# Altium PCB PCB1.PcbDoc
Units mm, origin at the board's own origin, x right, y up, seen from the top; angles counter-clockwise.
Board outline 110 x 40 mm, 2 copper layers (Top Layer, Bottom Layer); 97 components, 95 nets, 269 pads, 52 vias.
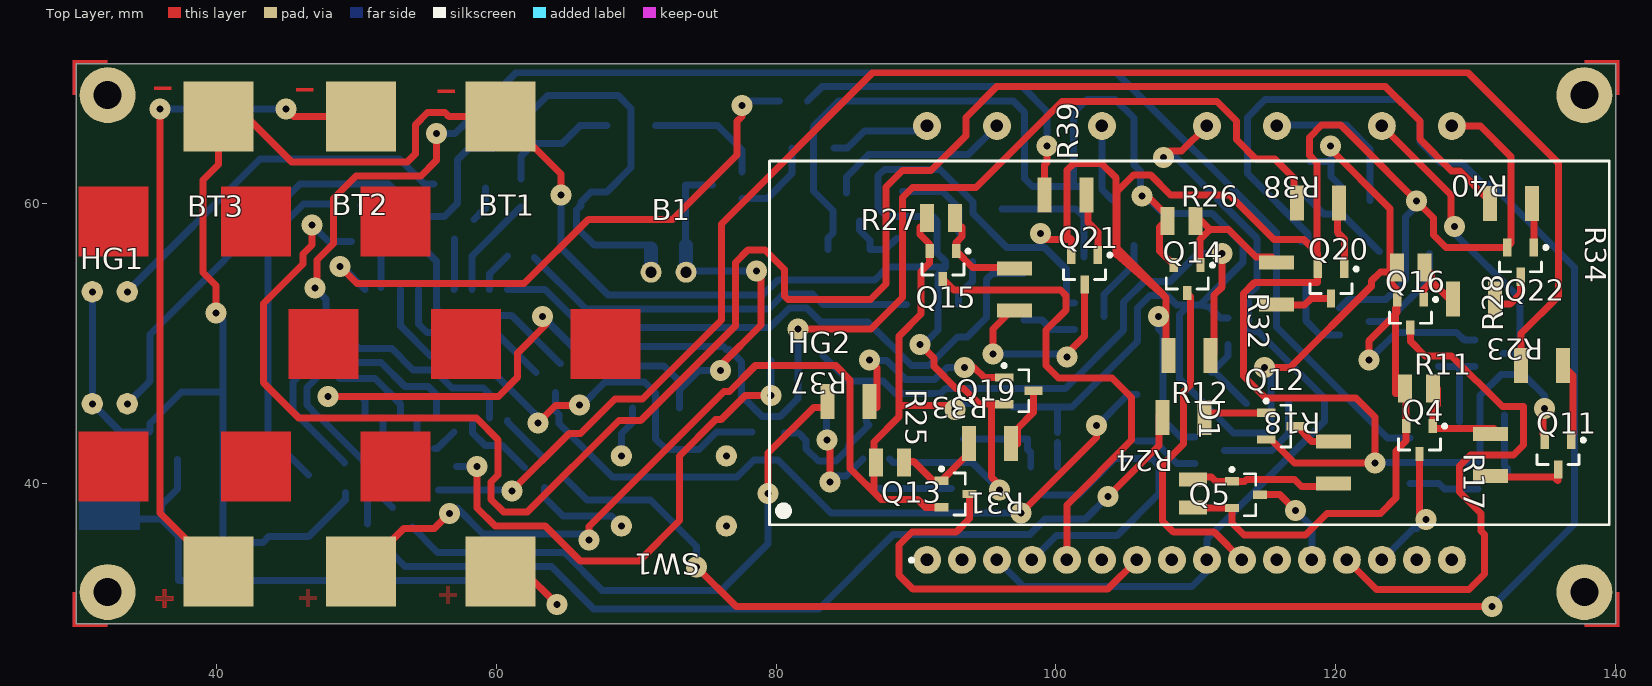
[diagram p0: Top Layer view]
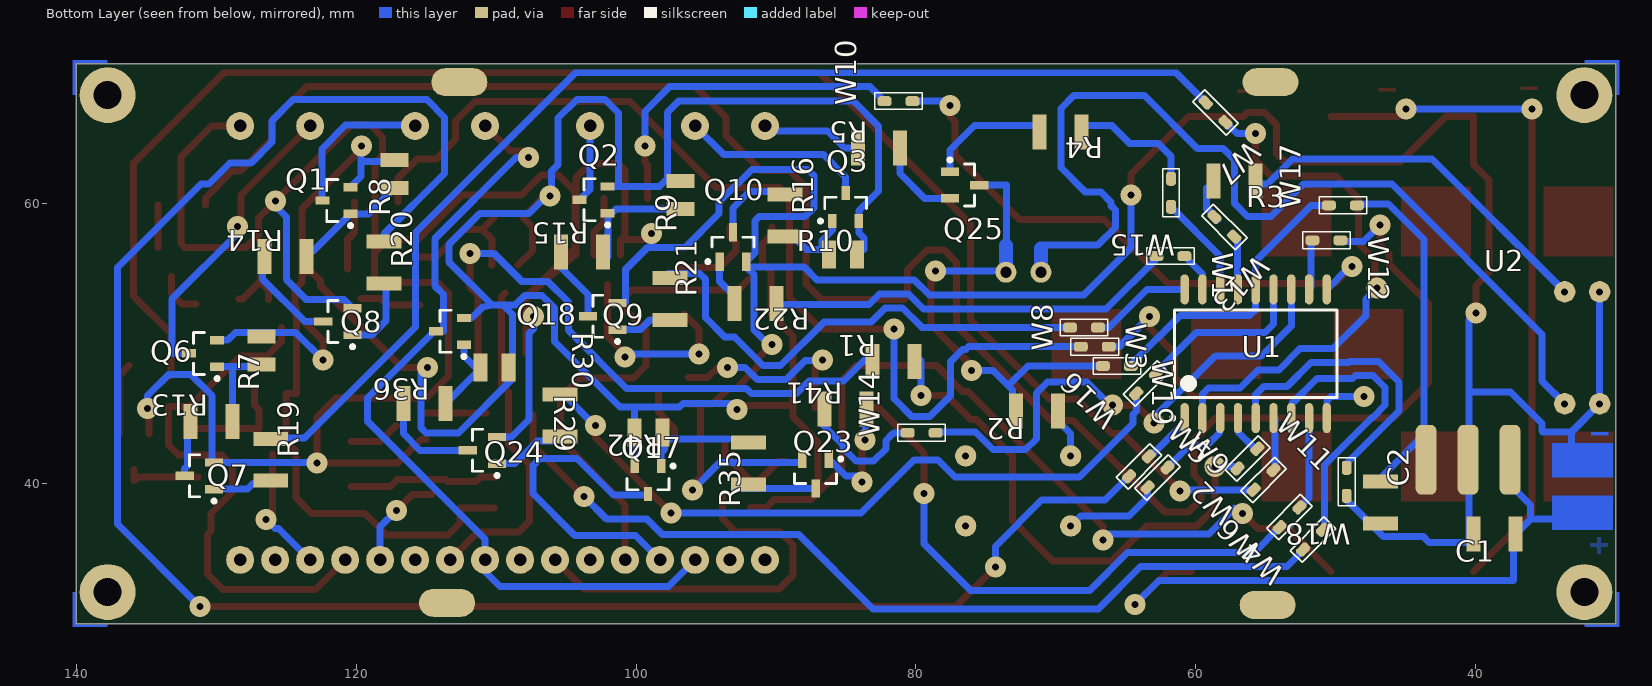
[diagram p1: Bottom Layer view, seen from below]

## Layer stack, top to bottom
Top Solder: solder mask 0.0102, Solder Resist, Dk 3.5
Top Layer: signal copper 0.0356
Dielectric 1: dielectric 0.32, FR-4, Dk 4.8
Bottom Layer: signal copper 0.0356
Bottom Solder: solder mask 0.0102, Solder Resist, Dk 3.5

## Board outline
30,30 30,70 140,70 140,30

## Design rules (kind name [scope] priority, off if disabled: settings)
Clearance [All] p1: gap=0.5 ignorepadtopadclearanceinfootprint=FALSE except(0: Arc-Hole Track-Hole SMDPad-Hole THPad-Hole Via-Hole Fill-Hole Poly-Hole Region-Hole Text-Hole)
HoleSize [All] p1: absolutevalues=TRUE maxlimit=1 minlimit=0.05 maxpercent=80.000 minpercent=20.000
HoleToHoleClearance [All] p1: gap=1 allowstackedmicrovias=TRUE
MinimumSolderMaskSliver [All] p1: minsoldermaskwidth=1
PolygonConnect [All] p1: connectstyle=Relief reliefconductorwidth=0.254 reliefentries=4 polygonreliefangle="90 Angle" airgapwidth=0.254
RoomDefinition Sheet1 [InComponentClass('Sheet1')] p1: confinementstyle=ConfineIn formatcopy=TRUE lockcomponents=FALSE outline 0,0 50.8,0 50.8,25.4 0,25.4
RoutingVias [All] p1: holewidth=0.5 width=1 viastyle="Through Hole" minholewidth=0.5 minwidth=1 maxholewidth=0.5 maxwidth=1.27
SolderMaskExpansion [All] p1: expansion=0.102
Width [All] p1: maxlimit=1 minlimit=0.5 preferedwidth=0.5
27 further rules are at their usual default settings.

## Components (designator, comment, footprint, x,y, rotation, side; value= is the part's Value field where it differs from the comment)
B1 "Motor" MOTOR 71.075,55.1 r0 top
BT1 "Battery 12V" BATTERYA23 50.3,56.229 r90 top
BT2 "Battery 12V" BATTERYA23 40.35,56.229 r90 top
BT3 "Battery 12V" BATTERYA23 30.175,56.229 r90 top
C1 "12V" F1206#1 40.675,35.15 r180 bottom value=330nF
C2 "6V" F1206#2 45.55,40.65 r90 bottom value=100nF
D1 "LED3" F1206#2 111.55,47.9 r0 top
HG1 "TLP621" Photocoupler 33.65,53.2 r270 top
HG2 "IVL2-7/5" -IVL2-7/5 109.535,50.05 r90 top locked
Q1 "BC856" SOT23_L 121.4,60.225 r0 bottom
Q2 "BC856" SOT23_L 103.025,60.275 r0 bottom
Q3 "BC856" SOT23_L 85.025,59.75 r90 bottom
Q4 "BC856" SOT23_L 125.975,43.1 r270 top
Q5 "BC856" SOT23_L 113.575,39.2 r0 top
Q6 "BC856" SOT23_L 130.925,49.3 r0 bottom
Q7 "BC847" SOT23_N 131.2,40.55 r0 bottom
Q8 "BC847" SOT23_N 121.3,51.575 r0 bottom
Q9 "BC847" SOT23_N 102.375,51.95 r0 bottom
Q10 "BC847" SOT23_N 93.075,56.9 r90 bottom
Q11 "BC847" SOT23_N 135.875,42.05 r270 top
Q12 "BC847" SOT23_N 116.075,44.1 r0 top
Q13 "BC856" SOT23_L 92.825,39.25 r0 top
Q14 "BC856" SOT23_L 109.375,54.6 r270 top
Q15 "BC856" SOT23_L 91.925,55.6 r270 top
Q16 "BC856" SOT23_L 125.325,52.15 r270 top
Q17 "BC856" SOT23_L 99.15,40.25 r270 bottom
Q18 "BC856" SOT23_L 113.3,50.875 r0 bottom
Q19 "BC847" SOT23_N 97.35,46.625 r0 top
Q20 "BC847" SOT23_N 119.65,54.275 r270 top
Q21 "BC847" SOT23_N 102.05,55.275 r270 top
Q22 "BC847" SOT23_N 133.2,55.825 r270 top
Q23 "BC847" SOT23_N 87.175,40.7 r270 bottom
Q24 "BC847" SOT23_N 110.975,42.375 r0 bottom
Q25 "BC847" SOT23_N 76.525,61.325 r180 bottom
R1 "Res2" F1206#2 83.6,49.975 r0 bottom value=100Ohm
R2 "Res2" F1206#1 73.35,43.925 r180 bottom value=10K
R3 "Res2" F1206#2 55.25,60.35 r180 bottom value=120Ohm?
R4 "Res2" F1206#2 67.675,63.875 r180 bottom value=3,3k
R5 "Res2" F1206#2 84.65,65.225 r0 bottom value="56-100 Ohm"
R7 "Res2" F0805 127.775,48 r270 bottom value=10K
R8 "Res2" F0805 118.275,60.625 r270 bottom value=10K
R9 "Res2" F0805 97.825,59.125 r270 bottom value=10K
R10 "Res2" F0805 86.725,57.353 r0 bottom value=10K
R11 "Res2" F0805 127.45,45.8 r0 top value=10K
R12 "Res2" F0805 110.795,40.8 r90 top value=10K
R13 "Res2" F1206#2 132.325,45.675 r0 bottom value=330K
R14 "Res2" F1206#2 127.05,57.475 r0 bottom value=330K
R15 "Res2" F1206#2 105.875,57.8 r0 bottom value=330K
R16 "Res2" F1206#2 88.1,61.15 r90 bottom value=330K
R17 "Res2" F1206#2 129.8,40.025 r270 top value=330K
R18 "Res2" F1206#2 121.075,43.5 r90 top value=330K
R19 "Res2" F1206#2 124.85,43.7 r90 bottom value=10K
R20 "Res2" F1206#2 116.775,57.8 r90 bottom value=10K
R21 "Res2" F1206#2 96.325,55.2 r90 bottom value=10K
R22 "Res2" F1206#2 89.45,51.625 r180 bottom value=10K
R23 "Res2" F1206#2 132.725,49.675 r180 top value=10K
R24 "Res2" F1206#2 107.1,45.975 r180 top value=10K
R25 "Res2" F0805 89.65,40.5 r0 top value=10K
R26 "Res2" F0805 110.475,57.75 r0 top value=10K
R27 "Res2" F0805 93.3,57.988 r0 top value=10K
R28 "Res2" F0805 126.85,54.423 r0 top value=10K
R29 "Res2" F0805 97.6,42.65 r180 bottom value=10K
R30 "Res2" F0805 111.6,49.3 r0 bottom value=10K
R31 "Res2" F1206#2 97.275,41.6 r0 top value=330K
R32 "Res2" F1206#2 114.5,52.3 r270 top value=330K
R33 "Res2" F1206#2 95.8,51.875 r270 top value=330K
R34 "Res2" F1206#2 131.875,51.95 r0 top value=330K
R35 "Res2" F1206#2 93.225,39.425 r270 bottom value=330K
R36 "Res2" F1206#2 117.1,46.975 r0 bottom value=330K
R37 "Res2" F1206#2 83.175,47.125 r180 top value=10K
R38 "Res2" F1206#2 116.725,61.3 r180 top value=10K
R39 "Res2" F1206#2 98.7,61.875 r180 top value=10K
R40 "Res2" F1206#2 130.5,61.275 r180 top value=10K
R41 "Res2" F1206#2 87.05,46.575 r0 bottom value=10K
R42 "Res2" F1206#2 104.2,46.875 r90 bottom value=10K
SW1 "Key" Button 68.95,41.975 r0 top
U1 "PIC16F628-04I/SO" MCHP-SOIC-SO18_N 55.725,49.275 r90 bottom
U2 "L7805ABV" KREN 35.55,48.7 r180 bottom
W1 "Jumper" перемычка 62.825,56.25 r180 bottom
W2 "Jumper" перемычка 54.455,40.973 r315 bottom
W3 "Jumper" перемычка 69,51.15 r180 bottom
W4 "Jumper" перемычка 50.925,36.7 r315 bottom
W5 "Jumper" перемычка 64.775,40.525 r135 bottom
W6 "Jumper" перемычка 52.6,38.3 r315 bottom
W7 "Jumper" перемычка 59.3,67.225 r225 bottom
W8 "Jumper" перемычка 66.225,49.775 r0 bottom
W9 "Jumper" перемычка 63.449,39.726 r135 bottom
W10 "Jumper" перемычка 80.25,67.325 r0 bottom
W11 "Jumper" перемычка 57.025,41.075 r135 bottom
W12 "Jumper" перемычка 51.675,57.375 r180 bottom
W13 "Jumper" перемычка 58.675,59.05 r225 bottom
W14 "Jumper" перемычка 78.6,43.625 r0 bottom
W15 "Jumper" перемычка 61.775,61.775 r270 bottom
W16 "Jumper" перемычка 62.85,47.85 r315 bottom
W17 "Jumper" перемычка 48.5,59.875 r0 bottom
W18 "Jumper" перемычка 49.225,41.125 r270 bottom
W19 "Jumper" перемычка 66.65,48.4 r180 bottom

## Footprints (in the part's own frame and the unit in brackets; to place one, negate y for a bottom-side part, rotate by r counter-clockwise, add the part's x,y. Pads: shape width x height; smd on the part's side, far side on the other; paste and mask are expansions set on the pad)
-IVL2-7/5 [mm] "SOP, 32-Leads, Body 59,00x25,50mm, Pitch 2,50mm, IPC Medium Density"
  round 2 hole 0.9: 1(15.5,18.75) 2(15.5,13.75) 3(-15.5,13.75) 4(-15.5,11.25) 5(-15.5,8.75) 6(15.5,6.25) 7(-15.5,3.75) 8(15.5,-1.25) 9(-15.5,-1.25) 10(-15.5,-3.75) 11(15.5,-6.25) 12(-15.5,-8.75) 13(-15.5,-11.25) 14(-15.5,-13.75) 15(15.5,-13.75) 16(15.5,-18.75) 17(-15.5,-18.75) 18(-15.5,-16.25) 19(-15.5,-6.25) 20(-15.5,1.25) 21(-15.5,6.25) 22(-15.5,16.25) 23(-15.5,18.75)
  silkscreen extent -15.65,-30 13,30, body extent -13,-30 13,38, height 10
BATTERYA23 [mm]
  rect 5x5 smd: 1(-22.5,-10) 2(10,-10)
  Top Layer region: -8.75,-20 -3.75,-20 -3.75,-15 -8.75,-15
  Top Layer region: -17.5,-5 -12.5,-5 -12.5,0 -17.5,0
  Top Layer region: 0,-5 5,-5 5,0 0,0
Button [mm]
  round 1.524 hole 0.5: 1(0,0) 2(0,-5) 3(7.5,-5) 4(7.5,0)
F0805 [mm]
  rect 1x2 smd: 1(-0.5,1) 2(-2.5,1)
F1206#1 [mm]
  rect 1x2.5 smd: 1(0.5,1.25) 2(3.5,1.25)
F1206#2 [mm]
  rect 1x2.5 smd: 1(-0.5,1.25) 2(-3.5,1.25)
KREN [mm]
  rrect60% 1.5x5 smd: 1(-2,-7) 2(-5,-7) 3(-8,-7)
MCHP-SOIC-SO18_N [mm] "SOIC, 18-Leads, Body 11.55x7.5mm, Pitch 1.27mm, IPC Medium Density"
  oval 2.15x0.6 smd: 1(-4.6,5.08) 2(-4.6,3.81) 3(-4.6,2.54) 4(-4.6,1.27) 5(-4.6,0) 6(-4.6,-1.27) 7(-4.6,-2.54) 8(-4.6,-3.81) 9(-4.6,-5.08) 10(4.6,-5.08) 11(4.6,-3.81) 12(4.6,-2.54) 13(4.6,-1.27) 14(4.6,0) 15(4.6,1.27) 16(4.6,2.54) 17(4.6,3.81) 18(4.6,5.08)
  silkscreen extent -4.72,-5.8 3.12,6.06, body extent -3.75,-5.8 3.75,5.8, height 2.65
MOTOR [mm]
  round 1.5 hole 0.8: 1(0,0) 2(2.5,0)
Photocoupler [mm]
  round 1.524 hole 0.5: 1(-0.5,0) 2(-0.5,-2.5) 3(7.5,-2.5) 4(7.5,0)
SOT23_L [mm] "SOT23, 3-Leads, Body 2.9x1.3mm, Pitch 0.95mm, Lead Span 2.3mm, IPC High Density"
  rect 1x0.6 smd: 1(-1,0.95) 2(-1,-0.95) 3(1,0)
  silkscreen extent -1.12,-1.5 0.7,1.92, body extent -0.7,-1.5 0.7,1.5, height 1.1
SOT23_N [mm] "SOT23, 3-Leads, Body 2.9x1.3mm, Pitch 0.95mm, Lead Span 2.3mm, IPC Medium Density"
  rect 1.3x0.6 smd: 1(-1.05,0.95) 2(-1.05,-0.95) 3(1.05,0)
  silkscreen extent -1.17,-1.5 0.7,1.92, body extent -0.7,-1.5 0.7,1.5, height 1.1
перемычка [mm]
  rrect60% 1x0.7 smd: 1(0,0) 2(2,0)
  silkscreen extent -0.7,-0.6 2.7,0.6

## Part data
B1: "Motor, General Kind", LatestRevisionDate=17-Jul-2002, LatestRevisionNote="Re-released for DXP Platform.", PackageDescription="Capacitor (Radial); 2 Leads", PackageReference=RB5-10.5, Published=24-Mar-1999, Publisher="Altium Limited"
BT1 BT2 BT3: library part Battery, "Multicell Battery", LatestRevisionDate=17-Jul-2002, LatestRevisionNote="Re-released for DXP Platform.", PackageDescription="Battery; 2 Leads", PackageReference=BAT-2, Published=24-Mar-1999, Publisher="Altium Limited"
C1 C2: library part Cap, "Capacitor", LatestRevisionDate=17-Jul-2002, LatestRevisionNote="Re-released for DXP Platform.", PackageDescription="Radial Cap, Thru-Hole; 2 Leads; 0.3 in Pin Spacing", PackageReference=RAD-0.3, Published=8-Jun-2000, Publisher="Altium Limited"
D1: "Typical BLUE SiC LED", DatasheetVersion=16-Apr-2002, LatestRevisionDate=17-Dec-2003, LatestRevisionNote="PCB Footprint replaced.", PackageDescription="SM LED; 2 C-Bend Leads; Body 3.5 x 2.8 x 1.9 mm, inc leads (LxWxH typ)", PackageReference=3.5X2.8X1.9, PackageVersion=16-Apr-2002, Published=8-Jun-2000, Publisher="Altium Limited"
HG1: library part Photocoupler
Q1 Q2 Q3 Q4 Q5 Q6 Q13 Q14 Q15 Q16 Q17 Q18: "PNP General-purpose Transistor", ComponentLink1Description="Manufacturer Link", ComponentLink1URL=http://www.semiconductors.philips.com/, ComponentLink2Description=Datasheet, ComponentLink2URL=http://www.semiconductors.philips.com/acrobat/datasheets/BC856_BC857_BC858_6.pdf, DatasheetVersion=4-Feb-2002, LatestRevisionDate=12-Dec-2006, LatestRevisionNote="IPC-7351 Footprint Added.", PackageDescription="3-Pin SOT-23 Package 0.95 mm Pitch, 2.3 mm Lead Span", PackageReference=SOT23, PackageVersion=May-1999, Published=17-Sep-2003, Publisher="Altium Limited"
Q7 Q8 Q9 Q10 Q11 Q12 Q19 Q20 Q21 Q22 Q23 Q24 Q25: "NPN General-purpose Transistor", ComponentLink1Description="Manufacturer Link", ComponentLink1URL=http://www.semiconductors.philips.com/, ComponentLink2Description=Datasheet, ComponentLink2URL=http://www.semiconductors.philips.com/acrobat/datasheets/BC846_BC847_BC848_5.pdf, DatasheetVersion=4-Feb-2002, LatestRevisionDate=12-Dec-2006, LatestRevisionNote="IPC-7351 Footprint Added.", PackageDescription="3-Pin SOT-23 Package 0.95 mm Pitch, 2.3 mm Lead Span", PackageReference=SOT23, PackageVersion=May-1999, Published=17-Sep-2003, Publisher="Altium Limited"
R1 R2 R3 R4 R5 R7 R8 R9 R10 R11 R12 R13 R14 R15 R16 R17 R18 R19 R20 R21 R22 R23 R24 R25 R26 R27 R28 R29 R30 R31 R32 R33 R34 R35 R36 R37 R38 R39 R40 R41 R42: "Resistor", LatestRevisionDate=17-Jul-2002, LatestRevisionNote="Re-released for DXP Platform.", PackageDescription="Axial Device, Thru-Hole; 2 Leads; 0.4 in Pin Spacing", PackageReference=AXIAL-0.4, Published=8-Jun-2000, Publisher="Altium Limited"
SW1: library part SW
U1: "Flash-Based 8-Bit CMOS Microcontroller, 4 MHz, 16 I/O, -40 to 85 degC, 18-pin SOIC (SO18), Tube", Manufacturer=Microchip, Operation Voltage Range="3V - 5.5V", Supplier Part Number 1=PIC16F628-04I/SO-ND, ComponentLink1Description=Datasheet, ComponentLink1URL=http://ww1.microchip.com/downloads/en/DeviceDoc/40300C.pdf, ComponentLink2Description="Package Specification", ComponentLink2URL=http://www.microchip.com/stellent/groups/techpub_sg/documents/packagingspec/en012702.pdf, ComponentLink3Description="URL Link1", ComponentLink3URL="Product URL:http://www.microchip.com/datasheet/PIC16F628", DatasheetVersion="Rev. C", Digital Communication="0 -UART, 1 -A/E/USART, 0 -SPI, 0 -I2C", EEPROM Data Memory (bytes)=128, I/O Pins=16, Max. CPU Speed MHz=4, Memory Type=Flash, Mounting Technology="Surface Mount", PackageDescription="18-Lead Plastic Small Outline, 7.5 x 11.55 mm Body, 1.27 mm Pitch", PackageReference=SOIC-SO18, PackageVersion="C04-051C, 12/2012", Packing=TUBE, PartNumber=PIC16F628-04I/SO, Program Memory KBytes=3.5, Program Memory KWords=2, RAM=224, RoHS=TRUE, Supplier 1=Digi-Key, Supplier 2=Newark, Supplier 3=Mouser, Supplier Part Number 2=65K1041, Supplier Part Number 3=579-PIC16F628-04I/SO, Timers="2 - 8-bit, 1 - 16-bit"
U2: "Positive Voltage Regulator, 5V, 3-Pin TO-220", ComponentLink1Description="Manufacturer URL", ComponentLink1URL=http://www.st.com, ComponentLink2Description=Datasheet, ComponentLink2URL=http://www.st.com/internet/com/TECHNICAL_RESOURCES/TECHNICAL_LITERATURE/DATASHEET/CD00000444.pdf, ComponentLink3Description="Package Specification", ComponentLink3URL=http://www.st.com/internet/com/TECHNICAL_RESOURCES/TECHNICAL_LITERATURE/PACKAGE_INFORMATION/CD00004649.pdf, DatasheetVersion=Nov-2011, PackageDescription="TO, Thru-Hole, Vertical, Heatsink Mounted; 3 In-Line Leads; Pitch 2.54 mm", PackageReference=TO220, PackageVersion=ver3.0, PartNumber=L7805ABV
W1 W2 W3 W4 W5 W6 W7 W8 W9 W10 W11 W12 W13 W14 W15 W16 W17 W18 W19: "Jumper Wire", LatestRevisionDate=17-Jul-2002, LatestRevisionNote="Re-released for DXP Platform.", PackageDescription="Radial Cap, Thru-Hole; 2 Leads; 0.2 in Pin Spacing", PackageReference=RAD-0.2, Published=24-Mar-1999, Publisher="Altium Limited"

## Free pads (board coordinates)
  round 4 hole 2: 1(32.25,67.75) 2(137.75,67.75) 3(137.75,32.25) 4(32.25,32.25)
  oval 4x2 smd far side mask+0.102: 6(54.875,31.325)
  oval 4x2 smd far side: 7(54.675,68.675) 8(112.625,68.675) 9(113.5,31.475)

## Via types
v1: diameter 1.5, hole 0.5, Top Layer to Bottom Layer, 52 vias

## Nets (pads, with @x,y where several pads share a name; then routed paths per layer and width w, separated by ;. In a path a pad name is that pad's centre, name@x,y a point inside that pad or via, vN(x,y) a via of type N, cw(c..) or ccw(c..) an arc to the next point about the centre after c; other vN are vias at no path point)
5V: C2.1 U2.3 W17.1 | length 25.4
  Bottom Layer w0.5: U2.3@43.7,41.85 43.7,57.446 46.229,59.975 48.4,59.975 W17.1 ; U2.3@43.8,43.4 C2.1@46.6,40.6
GND: BT1.2 BT3.2 C1.1 C2.2 D1.2 HG1.2 HG1.3 HG2.16 Q7.2 Q8.2 Q9.2 Q10.2 Q11.2 Q12.2 Q19.2 Q20.2 Q21.2 Q22.2 Q23.2 Q24.2 U2.2 W18.2 | length 362
  Top Layer w0.5: v1(39.975,52.2) 39.975,54.15 39.05,55.075 39.05,61.675 40.175,62.8 BT3.2 42.15,66.229 45.4,62.979 53.654,62.979 54.225,63.55 54.225,65.621 55.104,66.5 56.346,66.5 56.618,66.229 BT1.2 60.521,66.229 64.625,62.125 v1(64.625,60.625) ; v1(90.304,49.927) 91.304,48.927 91.304,48.356 92.858,46.802 93.401,46.802 94.528,45.675 Q19.2 ; 95.4,45.675 95.4,40.45 95.975,39.875 v1(95.975,39.55) ; v1(98.9,57.875) 99.34,57.435 101.1,57.435 ; Q21.2 101.1,57.435 ; D1.2@107.875,49.325 107.875,53.264 ; Q12.2 115.367,43.15 117.042,41.475 v1(122.8,41.475) 122.8,44.75 121.45,46.1 114.979,46.1 113.4,47.679 113.4,53.575 114.206,54.381 118.7,54.381 Q20.2 118.7,56.458 ; HG2.16 130.325,65.55 132.525,63.35 132.525,57.171 Q22.2@132.25,56.896 ; Q22.2 Q22.2@132.25,56.896 ; Q11.2@134.798,43.55 134.798,45.273 v1(134.9,45.375) ; 101.1,57.435 100.8,57.735 100.8,62.4 101.275,62.875 103.266,62.875 104.307,61.834 104.307,56.382 107.875,53.264 ; 107.875,53.264 107.425,53.763 104.35,56.838 104.35,60.871 105.529,62.05 106.771,62.05 108.196,60.625 112.4,60.625 115.575,57.45 117.708,57.45 118.7,56.458 ; 118.7,56.458 118.65,56.508 118.65,62.911 118.106,63.455 118.106,64.724 118.985,65.603 120.347,65.603 126.969,58.981 126.969,57.767 127.861,56.875 128.539,56.875 132.229,56.875 Q22.2@132.25,56.896
  Bottom Layer w0.5: HG1.2 HG1.3 33.15,43.7 ; 33.15,40.925 33.15,43.7 ; v1(39.975,52.2) 40.5,51.675 40.5,46.55 ; W18.2@49.225,39.375 49.225,38.825 46.6,36.2 43.732,36.2 43.332,35.8 40.5,35.8 40.5,46.55 ; v1(64.625,60.625) 64.625,56.85 68.01,53.465 79.04,53.465 80.125,54.55 87.062,54.55 87.986,55.474 Q10.2@92.125,55.474 ; Q23.2 88.371,41.504 94.021,41.504 v1(95.975,39.55) ; v1(90.304,49.927) 90.527,49.927 91.575,50.975 91.575,54.924 Q10.2@92.125,55.474 ; v1(98.9,57.875) 98.9,56.875 98.925,56.85 ; Q9.2 100.736,52.9 100.736,55.314 99.2,56.85 98.925,56.85 ; v1(107.33,51.928) 107.33,51.047 107.645,50.732 107.645,44.577 108.897,43.325 Q24.2 ; Q8.2 120.875,53.15 123.564,53.15 124.975,54.561 124.975,59.05 v1@126.2,60.275 ; v1(122.8,41.475) 122.825,41.5 Q7.2 130.3,41.65 130.3,46.286 131.789,47.775 133.411,47.775 134.9,46.286 v1(134.9,45.375) ; 33.15,43.7 35.225,43.7 35.275,43.75 35.275,44.3 37.525,46.55 40.5,46.55 ; Q10.2@92.125,55.474 Q10.2 91.5,56.475 91.5,58.775 91.2,59.075 87.925,59.075 87.3,59.7 87.3,62.011 87.739,62.45 91.729,62.45 94.075,60.104 94.075,59.289 96.514,56.85 98.925,56.85
  other v1: 125.775,60.2
I_SEGMENT_A: HG2.14 Q4.3 | length 9.2
  Top Layer w0.5: Q4.3 125.975,37.875 v1(126.425,37.425)
  Bottom Layer w0.5: HG2.14 125.535,36.8 125.8,36.8 v1(126.425,37.425)
I_SEGMENT_B: HG2.12 Q5.3 | length 7
  Top Layer w0.5: Q5.3 116,39.2 v1(117.125,38.075)
  Bottom Layer w0.5: v1(117.125,38.075) 118.285,36.915 HG2.12
I_SEGMENT_C: HG2.7 Q13.3 | length 28
  Top Layer w0.5: Q13.3 93.828,39.25 93.828,37.503 92.875,36.55 89.725,36.55 88.775,35.6 88.775,33.45 89.775,32.45 103.685,32.45 HG2.7
I_SEGMENT_D: HG2.10 Q14.3 | length 24
  Top Layer w0.5: Q14.3 109.6,53.375 109.6,47.05 109.1,46.55 109.1,42.831 107.6,41.331 107.6,37.307 108.382,36.525 111.31,36.525 HG2.10
I_SEGMENT_E: HG2.5 Q15.3 | length 35.4
  Top Layer w0.5: Q15.3 92.7,53.825 100.318,53.825 100.725,53.418 100.725,52.382 99.3,50.957 99.3,48.429 100.179,47.55 104,47.55 105.41,46.14 105.41,43.104 100.785,38.479 HG2.5
I_SEGMENT_F: HG2.13 Q16.3 | length 38.6
  Top Layer w0.5: HG2.13 122.91,32.425 129.525,32.425 130.625,33.525 130.625,36.362 130.375,36.612 130.375,37.854 128.825,39.404 128.825,41.25 129.625,42.05 132.7,42.05 133.4,42.75 133.4,45.491 131.902,45.491 128.27,49.124 126.365,49.124 125.325,50.164 Q16.3
I_SEGMENT_G: HG2.4 Q17.3 | length 22.5
  Bottom Layer w0.5: HG2.4 100.035,36.3 104.378,36.3 107.374,39.296 107.374,41.272 106.871,41.775 104.216,41.775 101.616,39.175 Q17.3@99.15,39.175
I_SETKA1: HG2.15 Q6.3 | length 21.6
  Top Layer w0.5: HG2.15 128.219,60.616 128.219,58.638 v1(128.482,58.375)
  Bottom Layer w0.5: v1(128.482,58.375) 128.482,57.878 133.172,53.188 133.172,49.3 Q6.3
I_SETKA2: HG2.11 Q1.3 | length 11.1
  Bottom Layer w0.5: HG2.11 115.838,65.603 120.757,65.603 122.45,63.91 Q1.3@122.45,60.225
I_SETKA4: HG2.6 Q2.3 | length 5.6
  Bottom Layer w0.5: HG2.6 103.285,61.015 Q2.3
I_SETKA5: HG2.2 Q3.3 | length 13.4
  Bottom Layer w0.5: Q3.3 85.025,61.911 86.614,63.5 93.735,63.5 HG2.2
I_TOCHKI: HG2.3 HG2.8 HG2.9 Q18.3 | length 59.5
  Top Layer w0.5: v1(107.68,63.303) 108.127,63.75 108.985,63.75 HG2.8
  Bottom Layer w0.5: HG2.3 97.685,32.65 109.725,32.65 110.785,33.71 110.785,36.033 119.2,44.448 119.2,46.121 114.446,50.875 Q18.3 113.767,50.875 113.767,53.518 114.38,54.132 114.38,57.488 108.566,63.303 v1(107.68,63.303)
NetB1_1: B1.1 HG1.4 | length 69.6
  Bottom Layer w0.5: HG1.4 35.261,47.311 35.261,50.661 46,61.4 52.314,61.4 54.639,59.075 56.3,59.075 57.225,60 57.225,63.125 58.048,63.948 59.901,63.948 63.678,67.725 68.725,67.725 69.65,66.8 69.65,62.568 67.907,60.825 66.782,60.825 66.05,60.093 66.05,59.846 65.75,59.546 65.75,58.304 67.025,57.029 70.846,57.029 71.075,56.8
  Bottom Layer w1: B1.1 71.075,56.8
NetB1_2: B1.2 Q25.3 R2.1 W19.1 | length 34.9
  Top Layer w0.5: v1(76.05,48.075) 76.05,48.45 78.925,51.325 v1@78.925,54.85
  Bottom Layer w0.5: W19.1 72,48.4 73.412,46.988 ; R2.1@73.1,45.4 73.1,46.675 74.5,48.075 v1(76.05,48.075) ; B1.2@73.55,55.3 73.55,61.325 Q25.3 ; B1.2@73.663,55.187 73.672,55.178 v1(78.604,55.178)
  Bottom Layer w1: B1.2 73.575,57.025
NetBT1_1: BT1.1 C1.2 U2.1 | length 44.9
  Top Layer w0.5: BT1.1 61.996,33.729 v1(64.35,31.375)
  Bottom Layer w0.5: 33.6,37.45 36.1,37.45 ; U2.1@37.25,41.725 37.25,39.606 36.1,38.456 36.1,37.45 ; v1(64.35,31.375) 62.65,33.075 37.315,33.075 37.315,36.235 36.1,37.45
NetBT2_1: BT2.1 Q1.2 Q2.2 Q3.2 Q4.2 Q5.2 Q6.2 Q13.2 Q14.2 Q15.2 Q16.2 Q17.2 Q18.2 R7.2 R8.2 R9.2 R10.2 R11.2 R12.2 R25.2 R26.2 R27.2 R28.2 R29.2 R30.2 | length 277.2
  Top Layer w0.5: BT2.1 53.426,36.805 55.605,36.805 v1(56.675,37.875) ; v1(66.65,35.95) 66.65,36.939 76.286,46.575 76.671,46.575 78.514,48.418 84.272,48.418 85.3,47.39 85.3,41.083 87.508,38.875 90.099,38.875 90.674,38.3 Q13.2 ; 87,39.5 87,42.975 88.804,44.779 88.804,50.549 90.354,52.099 90.354,55.15 90.975,55.771 Q15.2 90.975,57.125 90.3,57.8 R27.2@90.3,58.325 ; 88.875,45.575 90.825,45.575 92.507,45.575 v1(92.78,45.302) ; v1(106.15,60.55) 106.529,60.55 108.075,59.004 107.4,58.329 107.4,56.625 Q14.2 ; R12.2@110.125,38.25 Q5.2@112.573,38.25 ; Q5.2 Q5.2@112.573,38.25 ; v1(114.9,48.3) 116.736,48.3 122.53,54.094 122.53,54.465 123.19,55.125 R28.2@123.85,55.125 ; v1(119.606,64.103) 119.606,63.9 123.85,59.656 R28.2@123.85,55.125 ; v1(122.35,48.825) 122.35,50.197 124.275,52.122 ; Q5.2@112.573,38.25 112.573,37.186 113.442,36.317 117.825,36.317 119.38,37.871 123.19,37.871 124.3,38.981 124.3,42.328 125.025,43.053 Q4.2 125.025,46.445 124.275,46.445 124.275,52.122 ; R28.2@123.85,55.125 123.85,54.398 124.375,53.873 Q16.2 124.375,52.638 ; 124.275,52.122 124.375,52.222 124.375,52.638 ; 124.275,52.122 124.275,52.538 124.375,52.638
  Bottom Layer w0.5: v1(56.675,37.875) 56.85,37.875 57.225,38.25 59.077,36.398 66.202,36.398 v1(66.65,35.95) ; R10.2@83.725,56.725 83.725,57.556 84.075,57.906 Q3.2 84.075,59.512 82.675,60.912 82.675,65.525 84.475,67.325 96.95,67.325 97.75,66.525 97.75,61.791 98.316,61.225 Q2.2 ; v1(92.78,45.302) 93.197,45.72 96.655,45.72 96.9,45.475 101.152,45.475 105.825,50.148 105.825,52.544 106.709,53.428 107.952,53.428 108.629,52.75 109.494,52.75 ; R29.2 100.1,45.45 ; Q17.2@100.125,41.175 R29.2@100.125,42.95 ; 101.25,61.225 101.25,66.475 102.225,67.45 104.229,67.45 105.575,66.104 105.575,62.775 106.025,62.325 106.025,60.9 107.635,59.29 111.165,59.29 113.38,57.074 113.38,55.831 110.299,52.75 110.275,52.75 ; Q18.2 111.745,51.825 110.973,52.598 110.275,52.75 ; v1(114.9,48.3) 115.35,47.85 115.35,43.975 115,43.625 112.687,43.625 108.825,47.487 108.825,51.301 108.83,51.306 108.83,52.087 109.494,52.75 ; R8.2@118.15,63 119.65,63 119.65,62.475 ; v1(119.606,64.103) 119.65,64.059 119.65,62.475 ; Q1.2 119.65,61.925 119.65,62.475 ; v1(122.35,48.825) 124.325,50.8 128.626,50.8 129.176,50.25 Q6.2 ; 109.494,52.75 110.275,52.75
NetBT2_2: BT2.2 BT3.1 | length 49.3
  Top Layer w0.5: v1(36,66.75) 36,37.904 BT3.1 ; v1(45,66.75) 45.521,66.229 BT2.2
  Bottom Layer w0.5: v1@36,66.75 v1(45,66.75)
NetD1_1: D1.1 R1.1 | length 42.4
  Top Layer w0.5: D1.1@111.3,49.325 111.3,53.475 111.88,54.055 v1(111.88,56.453)
  Bottom Layer w0.5: R1.1@83.35,49.15 85.173,47.327 87.633,47.327 88.533,46.427 91.754,46.427 92.129,46.802 100.674,46.802 104.825,50.954 104.825,52.958 106.317,54.45 108.168,54.45 110.171,56.453 v1(111.88,56.453)
NetHG1_1: HG1.1 R3.1 | length 26.6
  Bottom Layer w0.5: HG1.1 43.125,63.175 53.1,63.175 54.875,61.4 R3.1@55.55,61.4
NetHG2_1: HG2.1 R5.1 | length 7.3
  Bottom Layer w0.5: R5.1 85.1,63.975 86.325,65.2 90.435,65.2 HG2.1
NetQ1_1: Q1.1 R8.1 R14.2 | length 7.7
  Bottom Layer w0.5: R8.1 119.125,59.275 Q1.1 R14.2@123.1,56.575
NetQ2_1: Q2.1 R9.1 R15.2 | length 8.9
  Bottom Layer w0.5: R9.1@96.15,59.625 101.425,59.625 102,59.05 R15.2@102,56.2
NetQ3_1: Q3.1 R10.1 R16.2 | length 5
  Bottom Layer w0.5: Q3.1 85.975,58.103 86.725,57.353 86.725,56.725 87.833,56.725 88.633,57.525 R16.2@89.05,57.525
NetQ4_1: Q4.1 R11.1 R17.2 | length 7.4
  Top Layer w0.5: R11.1@127.275,46.8 127.275,45.613 126.925,45.263 Q4.1 126.925,43.925 R17.2@131.3,43.925
NetQ5_1: Q5.1 R12.1 R18.2 | length 10.8
  Top Layer w0.5: R12.1@110,40.475 111.12,40.475 111.445,40.15 Q5.1 113.462,40.15 113.603,40.291 117.036,40.291 117.553,39.775 R18.2@120.375,39.775
NetQ6_1: Q6.1 R7.1 R13.2 | length 6.5
  Bottom Layer w0.5: R7.1@127.325,48.35 Q6.1 ; R13.2 128.825,48.275
NetQ7_1: Q7.1 R19.2 | length 5
  Bottom Layer w0.5: R19.2@125.3,40 127.361,40 127.761,39.6 Q7.1
NetQ7_3: Q7.3 R13.1 | length 4.4
  Bottom Layer w0.5: R13.1@132.05,44.9 132.05,41.264 132.25,41.064 Q7.3
NetQ8_1: Q8.1 R20.2 | length 5.5
  Bottom Layer w0.5: R20.2@117.85,54.3 117.85,51.65 118.875,50.625 Q8.1
NetQ8_3: Q8.3 R14.1 | length 7.4
  Bottom Layer w0.5: Q8.3 123.66,51.575 126.675,54.59 R14.1@126.675,56.45
NetQ9_1: Q9.1 R21.2 | length 3.9
  Bottom Layer w0.5: R21.2@97.7,51.7 98.989,51.7 99.689,51 Q9.1
NetQ9_3: Q9.3 R15.1 | length 6
  Bottom Layer w0.5: Q9.3 103.425,53.5 105.587,55.662 R15.1@105.587,57.012
NetQ10_1: Q10.1 R22.2 | length 3.5
  Bottom Layer w0.5: R22.2@93.05,52.8 93.05,53.478 94.025,54.453 Q10.1
NetQ10_3: Q10.3 R16.1 | length 6.3
  Bottom Layer w0.5: R16.1@89.05,60.875 91.89,60.875 93.075,59.69 Q10.3
NetQ11_1: Q11.1 R23.2 | length 5.2
  Top Layer w0.5: R23.2 136.925,47.725 Q11.1@136.925,43.55
NetQ11_3: Q11.3 R17.1 | length 5.5
  Top Layer w0.5: R17.1@131.3,40.475 135.6,40.475 135.875,40.2 Q11.3
NetQ12_1: Q12.1 R24.2 | length 4.3
  Top Layer w0.5: R24.2@110.725,45.05 Q12.1
NetQ12_3: Q12.3 R18.1 | length 3.7
  Top Layer w0.5: Q12.3 117.175,44.1 118.275,43 R18.1@120.375,43
NetQ13_1: Q13.1 R25.1 R31.2 | length 6.5
  Top Layer w0.5: R25.1@89.275,41.575 89.84,41.575 91.215,40.2 Q13.1 93.65,42.025 R31.2@93.65,42.825
NetQ14_1: Q14.1 R26.1 R32.2 | length 9.3
  Top Layer w0.5: R26.1@110.15,59.025 110.15,59.004 111.004,58.15 ; Q14.1 110.307,55.618 110.307,57.453 111.004,58.15 ; R32.2@115.425,56.175 114.3,56.175 112.325,58.15 111.004,58.15
NetQ15_1: Q15.1 R27.1 R33.2 | length 6.4
  Top Layer w0.5: R27.1@93.3,58.325 93.3,57.651 92.875,57.226 Q15.1 94.05,55.425 R33.2@96.875,55.425
NetQ16_1: Q16.1 R28.1 R34.2 | length 4.7
  Top Layer w0.5: Q16.1 126.275,53.848 R28.1@126.85,54.423 ; R28.1 126.85,54.923 R28.1@126.85,54.423 ; R34.2 128.073,53.2 R28.1@126.85,54.423
NetQ17_1: Q17.1 R29.1 R35.2 | length 6.7
  Bottom Layer w0.5: 93.4,43.175 97.95,43.175 97.95,42.461 98.2,42.211 Q17.1@98.2,41.175
NetQ18_1: Q18.1 R30.1 R36.2 | length 6.1
  Bottom Layer w0.5: R30.1 111.1,48.225 111.263,48.062 R36.2 ; R30.1@111.125,47.925 112.3,49.1 Q18.1
NetQ19_1: Q19.1 R37.2 | length 14.5
  Top Layer w0.5: v1(86.679,48.827) 87.2,48.307 87.2,45.45 ; v1(93.48,48.302) 94.155,48.302 94.882,47.575 Q19.1
  Bottom Layer w0.5: v1(86.679,48.827) 86.732,48.775 87.921,48.775 89.269,47.427 91.34,47.427 92.215,48.302 v1(93.48,48.302)
NetQ19_3: Q19.3 R31.1 | length 4.3
  Top Layer w0.5: R31.1@97.25,42.825 97.25,43.942 98.4,45.092 Q19.3
NetQ20_1: Q20.1 R38.2 | length 5
  Top Layer w0.5: R38.2@120.1,60.1 120.1,57.955 120.6,57.455 Q20.1
NetQ20_3: Q20.3 R32.1 | length 4.4
  Top Layer w0.5: R32.1@115.425,52.75 117.764,52.75 118.239,53.225 Q20.3
NetQ21_1: Q21.1 R39.2 | length 4.3
  Top Layer w0.5: R39.2@102.275,60.35 102.275,58.688 103,57.963 Q21.1
NetQ21_3: Q21.3 R33.1 | length 14.4
  Top Layer w0.5: v1(95.501,49.251) 95.501,51.051 R33.1@96.562,52.112 ; v1(100.8,49.05) 100.8,49.271 102.05,50.521 Q21.3
  Bottom Layer w0.5: v1(95.501,49.251) 100.599,49.251 v1(100.8,49.05)
NetQ22_1: Q22.1 R40.2 | length 3
  Top Layer w0.5: Q22.1 R40.2@134.15,59.9
NetQ22_3: Q22.3 R34.1 | length 3.3
  Top Layer w0.5: R34.1@131.45,52.832 132.457,52.832 133.2,53.575 Q22.3
NetQ23_1: Q23.1 R41.2 | length 9.4
  Top Layer w0.5: v1(83.654,43.102) 83.85,42.906 83.85,40.106 v1(83.854,40.102)
  Bottom Layer w0.5: R41.2@83.6,46.025 83.6,43.406 83.904,43.102 v1(83.654,43.102) ; v1(83.854,40.102) 84.277,40.525 85,40.525 Q23.1
NetQ23_3: Q23.3 R35.1 | length 5.4
  Bottom Layer w0.5: Q23.3 R35.1@92.525,39.65
NetQ24_1: Q24.1 R42.2 | length 4.8
  Bottom Layer w0.5: R42.2@105.775,43.025 107.036,43.025 108.636,41.425 Q24.1
NetQ24_3: Q24.3 R36.1 | length 7.6
  Bottom Layer w0.5: Q24.3 115.425,42.375 116.625,43.575 R36.1@116.625,46.125
NetQ25_1: Q25.1 R4.2 | length 8.5
  Bottom Layer w0.5: R4.2@71.375,65.575 75.83,65.575 77.575,63.83 Q25.1
NetQ25_2: Q25.2 R5.2 | length 6.1
  Bottom Layer w0.5: Q25.2 79.225,60.375 79.375,60.375 81.15,62.15 R5.2
NetR1_2: R1.2 W11.1 | length 37.2
  Top Layer w0.5: v1(58.65,41.225) 58.65,38.257 59.925,36.982 63.496,36.982 66.029,34.45 70.2,34.45 73.1,37.35 73.1,41.975 75.686,44.561 76.071,44.561 77.786,46.275 v1(79.65,46.275)
  Bottom Layer w0.5: W11.1@57.175,41.225 v1(58.65,41.225) ; v1(79.65,46.275) R1.2@79.65,48.8
NetR2_2: R2.2 SW1.1 | length 3.8
  Bottom Layer w0.5: SW1.1 68.95,43.561 69.75,44.361 R2.2@69.75,45.4
NetR3_2: R3.2 W13.1 | length 2.6
  Bottom Layer w0.5: W13.1@58.425,58.875 59.15,59.6 59.25,59.6 R3.2@59.25,61.1
NetR4_1: R4.1 W15.1 | length 8.7
  Bottom Layer w0.5: W15.1 61.775,63.387 62.7,64.313 64.75,64.313 66.012,65.575 R4.1@67.925,65.575
NetSW1_2: SW1.2 W9.1 | length 7.1
  Bottom Layer w0.5: W9.1 63.449,38.989 64.77,37.668 68.257,37.668 SW1.2
NetU1_1: U1.1 W5.2 | length 3.7
  Bottom Layer w0.5: U1.1@60.805,44.495 60.805,44.399 63.264,41.939 W5.2
NetU1_2: U1.2 W7.2 | length 37.9
  Top Layer w0.5: v1(47.05,53.976) 47.2,54.126 47.2,55.986 48.375,57.161 48.375,60.364 49.989,61.979 54.629,61.979 55.725,63.075 v1(55.725,65)
  Bottom Layer w0.5: v1(47.05,53.976) 47.832,53.193 47.832,52.015 50.201,49.647 52.553,49.647 54.075,48.125 55.55,48.125 56.85,46.825 59.093,46.825 59.535,46.383 U1.2 ; v1(55.725,65) 57.075,65 W7.2
NetU1_3: U1.3 W9.2 | length 5.4
  Bottom Layer w0.5: U1.3@58.325,44.295 58.325,43.625 59.225,42.725 60.45,42.725 W9.2
NetU1_4: U1.4 W11.2 | length 1.9
  Bottom Layer w0.5: W11.2 55.799,42.489 U1.4@56.995,43.685
NetU1_5: U1.5 W18.1 | length 20.8
  Bottom Layer w0.5: W18.1@49.175,41.475 49.175,41.494 45.477,45.192 45.477,47.263 46.942,48.727 49.013,48.727 49.093,48.647 51.778,48.647 53.475,46.95 55.125,46.95 55.725,46.35 U1.5
NetU1_6: U1.6 W2.1 | length 3.6
  Bottom Layer w0.5: W2.1@54.347,41.081 54.347,44.567 U1.6
NetU1_7: U1.7 W4.1 | length 20.5
  Bottom Layer w0.5: W4.1@50.8,37.1 50.8,41.338 47.41,44.727 47.356,44.727 46.477,45.606 46.477,46.849 47.356,47.727 48.599,47.727 48.826,47.5 51.35,47.5 53.185,45.665 U1.7
NetU1_8: U1.8 W6.1 | length 6.7
  Bottom Layer w0.5: U1.8 51.915,38.985 W6.1
NetU1_9: U1.9 W8.1 | length 27.3
  Top Layer w0.5: v1(47.977,46.227) 60.172,46.227 61.544,47.6 61.544,49.319 63.575,51.35 63.575,51.65 63.3,51.925 v1(63.3,51.95)
  Bottom Layer w0.5: v1(47.977,46.227) 50.346,46.227 50.648,45.926 U1.9 ; v1(63.3,51.95) 65.475,49.775 W8.1
NetU1_10: U1.10 W10.1 | length 40
  Top Layer w0.5: v1(48.852,55.503) 50.075,54.28 62.005,54.28 66.587,58.863 72.613,58.863 77.225,63.475 77.225,65.886 77.575,66.236
  Bottom Layer w0.5: v1@49.17,55.35 U1.10 ; v1@77.9,67.325 W10.1
  other v1: 77.575,67
NetU1_11: U1.11 W12.1 | length 3.2
  Bottom Layer w0.5: U1.11@51.775,54.015 W12.1@51.775,57.2
NetU1_12: U1.12 W14.1 | length 36.5
  Top Layer w0.5: v1(63,44.325) 64.247,45.572 65.898,45.572 v1(65.953,45.627)
  Bottom Layer w0.5: U1.12 53.185,51.265 55.325,49.125 58.615,49.125 63,44.74 v1(63,44.325) ; v1(65.953,45.627) 66.167,45.627 67.789,47.25 70.611,47.25 71.399,46.461 71.399,43.18 72.161,42.418 74.498,42.418 75.755,43.675 W14.1@78.274,43.675
NetU1_13: U1.13 W16.1 | length 12.3
  Bottom Layer w0.5: U1.13 54.455,51.41 55.065,50.8 59.975,50.8 W16.1@62.85,47.925
NetU1_14: U1.14 W17.2 W19.2 | length 21
  Bottom Layer w0.5: W17.2@50.3,59.85 51.775,59.85 55.725,55.9 55.725,52.454 56.166,52.013 61.116,52.013 64.564,48.565 W19.2@64.61,48.565
NetU1_15: U1.15 W13.2 | length 3.6
  Bottom Layer w0.5: U1.15 57.011,53.891 W13.2@57.011,57.461
NetU1_16: U1.16 W15.2 | length 7.4
  Bottom Layer w0.5: U1.16 58.265,56.265 W15.2
NetU1_17: U1.17 W1.2 | length 2.9
  Bottom Layer w0.5: U1.17 59.535,54.96 W1.2
NetU1_18: U1.18 W3.2 | length 7.3
  Bottom Layer w0.5: U1.18 63.496,53.875 66.221,51.15 W3.2
SEGMENT_A: R23.1 W2.2 | length 115.4
  Top Layer w0.5: v1(61.15,39.482) 61.15,39.5 65.227,43.577 66.024,43.577 68.497,46.05 70.468,46.05 76.1,51.682 76.1,58.546 86.904,69.35 129.43,69.35 135.89,62.89 135.89,53.378 133.225,50.713 R23.1@133.225,47.675
  Bottom Layer w0.5: W2.2@55.878,39.55 61.082,39.55 v1(61.15,39.482)
SEGMENT_B: R24.1 W4.2 | length 63.8
  Top Layer w0.5: v1(103.712,39.069) 107.375,42.732 R24.1@107.375,44.9
  Bottom Layer w0.5: W4.2@52.302,35.248 52.327,35.248 53.5,34.075 63.95,34.075 66.975,31.05 83.075,31.05 88.4,36.375 98.149,36.375 99.224,37.45 102.093,37.45 v1(103.712,39.069)
SEGMENT_C: R37.1 W6.2 | length 40.5
  Top Layer w0.5: v1(79.425,39.3) 79.425,42.175 82.7,45.45 R37.1@83.55,45.45
  Bottom Layer w0.5: W6.2 55.825,35.075 ; 55.901,35.075 64.875,35.075 67.575,32.375 76.1,32.375 79.422,35.697 79.422,39.297 v1(79.425,39.3)
SEGMENT_D: R38.1 W8.2 | length 72.9
  Top Layer w0.5: v1(81.575,51.05) 86.781,51.05 89.027,53.296 89.027,60.427 89.75,61.15 94.279,61.15 100.429,67.3 111.51,67.3 112.898,65.912 112.898,64.577 114.302,63.173 115.649,63.173 117.025,61.797 R38.1@117.025,60.1
  Bottom Layer w0.5: W8.2@68.55,49.775 76.243,49.775 ; 76.443,49.575 76.671,49.575 77.55,48.696 77.55,46.254 79.029,44.775 80.271,44.775 81.575,46.079 v1(81.575,51.05)
SEGMENT_E: R39.1 W10.2 | length 24.6
  Top Layer w0.5: R39.1@99.2,60.35 99.2,62.776 99.375,62.951 v1(99.375,64.125)
  Bottom Layer w0.5: W10.2 83.275,68.35 97.6,68.35 99.375,66.575 v1(99.375,64.125)
SEGMENT_F: R40.1 W12.2 | length 139.1
  Top Layer w0.5: v1(46.85,58.475) 46.85,57.05 46.2,56.4 46.2,55.693 43.375,52.868 43.375,47.201 45.898,44.679 58.598,44.679 60.15,43.126 60.15,40.604 59.65,40.104 59.65,38.861 60.529,37.982 62.257,37.982 68.775,44.5 70.332,44.5 77.104,51.272 77.104,55.799 77.983,56.678 79.225,56.678 80.6,55.303 80.6,53.4 80.863,53.137 86.741,53.137 87.859,54.254 87.859,61.184 89.032,62.357 91.082,62.357 93.574,64.849 93.574,66.167 95.757,68.35 123.55,68.35 126,65.9 126,64.6 128.275,62.325 128.859,62.325 130.775,60.41 R40.1@130.775,59.9
  Bottom Layer w0.5: v1(46.85,58.475) 48.025,57.3 W12.2@49.675,57.3
SEGMENT_G: R41.1 W14.2 | length 9.4
  Bottom Layer w0.5: W14.2 81.613,43.625 ; 81.751,43.487 82.154,43.084 82.154,42.481 83.033,41.602 84.275,41.602 85.175,42.502 85.175,42.711 85.514,43.05 86.657,44.193 86.45,44.4 R41.1@86.45,45.3
SETKA1: R19.1 W7.1 | length 81.5
  Bottom Layer w0.5: W7.1 61.3,69.225 ; 61.375,69.35 104.325,69.35 115.748,57.927 115.748,51.192 123.689,43.25 R19.1@125.3,43.25
SETKA2: R20.1 W5.1 | length 138.7
  Top Layer w0.5: v1(74.325,34.05) 77.175,31.2 v1(131.15,31.2)
  Bottom Layer w0.5: W5.1 66.489,38.811 ; 66.539,38.811 71.018,38.811 74.325,35.505 v1(74.325,34.05) ; R20.1@117.5,57.3 R20.1 118.025,57.814 113.675,62.164 113.675,66.15 114.95,67.425 124.5,67.425 126.006,65.919 126.006,64.394 127.494,62.906 129.019,62.906 130.525,61.4 131.075,61.4 137.048,55.427 137.048,37.098 v1(131.15,31.2)
SETKA4: R21.1 W3.1 | length 35.3
  Bottom Layer w0.5: W3.1 79.554,51.15 80.954,52.55 82.196,52.55 83.221,51.525 86.586,51.525 89.683,48.427 90.926,48.427 92.976,50.477 93.663,50.477 95.047,51.861 95.047,54.594 95.453,55 R21.1@97.7,55
SETKA5: R22.1 W1.1 | length 28.9
  Bottom Layer w0.5: W1.1@62.728,56.153 66.416,52.465 79.454,52.465 80.539,53.55 82.611,53.55 83.361,52.8 89.325,52.8
TOCHKI: R42.1 W16.2 | length 51.3
  Top Layer w0.5: v1(97.505,37.902) 102.9,43.297 v1(102.9,44.15)
  Bottom Layer w0.5: W16.2@64.253,46.522 64.253,45.193 64.5,44.946 64.5,44.287 68.324,40.463 77.217,40.463 78.441,41.687 80.148,41.687 83.933,37.902 v1(97.505,37.902) ; v1(102.9,44.15) 102.95,44.15 105.155,46.355 R42.1@105.775,46.355
pads on no net: HG2.17 HG2.18 HG2.19 HG2.20 HG2.21 HG2.22 HG2.23 SW1.3 SW1.4

## Polygon pours and split planes (outlines as drawn)
no net on Bottom Layer "Bottom Layer-No Net" (solid, pour order 10): 30.575,35.75 31.075,35.75 31.075,36.25 31.325,36.25 31.325,35.75 31.825,35.75 31.825,35.5 31.325,35.5 31.325,35 31.075,35 31.075,35.5 30.575,35.5
no net on Top Layer "Bottom Layer-No Net" (solid, pour order 9): 36.95,31.925 36.45,31.925 36.45,32.425 36.2,32.425 36.2,31.925 35.7,31.925 35.7,31.675 36.2,31.675 36.2,31.175 36.45,31.175 36.45,31.675 36.95,31.675
no net on Top Layer "Bottom Layer-No Net" (solid, pour order 8): 36.95,31.925 36.45,31.925 36.45,32.425 36.2,32.425 36.2,31.925 35.7,31.925 35.7,31.675 36.2,31.675 36.2,31.175 36.45,31.175 36.45,31.675 36.95,31.675
no net on Top Layer "Bottom Layer-No Net" (solid, pour order 7): 47.175,31.95 46.675,31.95 46.675,32.45 46.425,32.45 46.425,31.95 45.925,31.95 45.925,31.7 46.425,31.7 46.425,31.2 46.675,31.2 46.675,31.7 47.175,31.7
no net on Top Layer "Bottom Layer-No Net" (solid, pour order 6): 57.175,32.15 56.675,32.15 56.675,32.65 56.425,32.65 56.425,32.15 55.925,32.15 55.925,31.9 56.425,31.9 56.425,31.4 56.675,31.4 56.675,31.9 57.175,31.9

## Other copper
Top Layer:
  region: 36.8,68.375 35.55,68.375 35.55,68.125 36.8,68.125
  region: 46.95,68.275 45.7,68.275 45.7,68.025 46.95,68.025
  region: 57.075,68.15 55.825,68.15 55.825,67.9 57.075,67.9
  region: 140.25,70 140.25,70.25 137.75,70.25 137.75,70
  region: 140.25,67.75 140.25,70.25 140,70.25 140,67.75
  rectangle: 137.75,29.75 140.25,30
  rectangle: 140,29.75 140.25,32.25
  region: 32.25,70.25 29.75,70.25 29.75,70 32.25,70
  region: 30,70.25 29.75,70.25 29.75,67.75 30,67.75
  region: 29.75,32.25 29.75,29.75 30,29.75 30,32.25
  region: 29.75,30 29.75,29.75 32.25,29.75 32.25,30
Bottom Layer:
  rectangle net NetBT1_1: 30.2,36.675 34.55,39.15
  rectangle net GND: 30.2,40.425 34.575,42.9
  rectangle: 30.525,43.425 31.775,43.675
  rectangle: 137.75,70 140.25,70.25
  rectangle: 140,67.75 140.25,70.25
  region: 137.75,30 137.75,29.75 140.25,29.75 140.25,30
  region: 140,32.25 140,29.75 140.25,29.75 140.25,32.25
  region: 32.25,70 32.25,70.25 29.75,70.25 29.75,70
  region: 30,67.75 30,70.25 29.75,70.25 29.75,67.75
  region: 30,32.25 29.75,32.25 29.75,29.75 30,29.75
  region: 32.25,30 29.75,30 29.75,29.75 32.25,29.75

## Silkscreen, mask and mechanical layers (free items; w line width, h text height)
Drill Guide:
  the board outline again, w0.254

## Text inside footprints (layer, text, board x,y; h text height)
HG2: Route Tool Path "ИВЛ2-7/5" at 117.535,51.55 h4.52 r180